# Altium PCB LPS PCB.PcbDoc
Units mm, origin at the board's own origin, x right, y up, seen from the top; angles counter-clockwise.
Board outline 152.4 x 101.6 mm, 2 copper layers (Top Layer, Bottom Layer); 23 components, 10 nets, 49 pads, 0 vias.
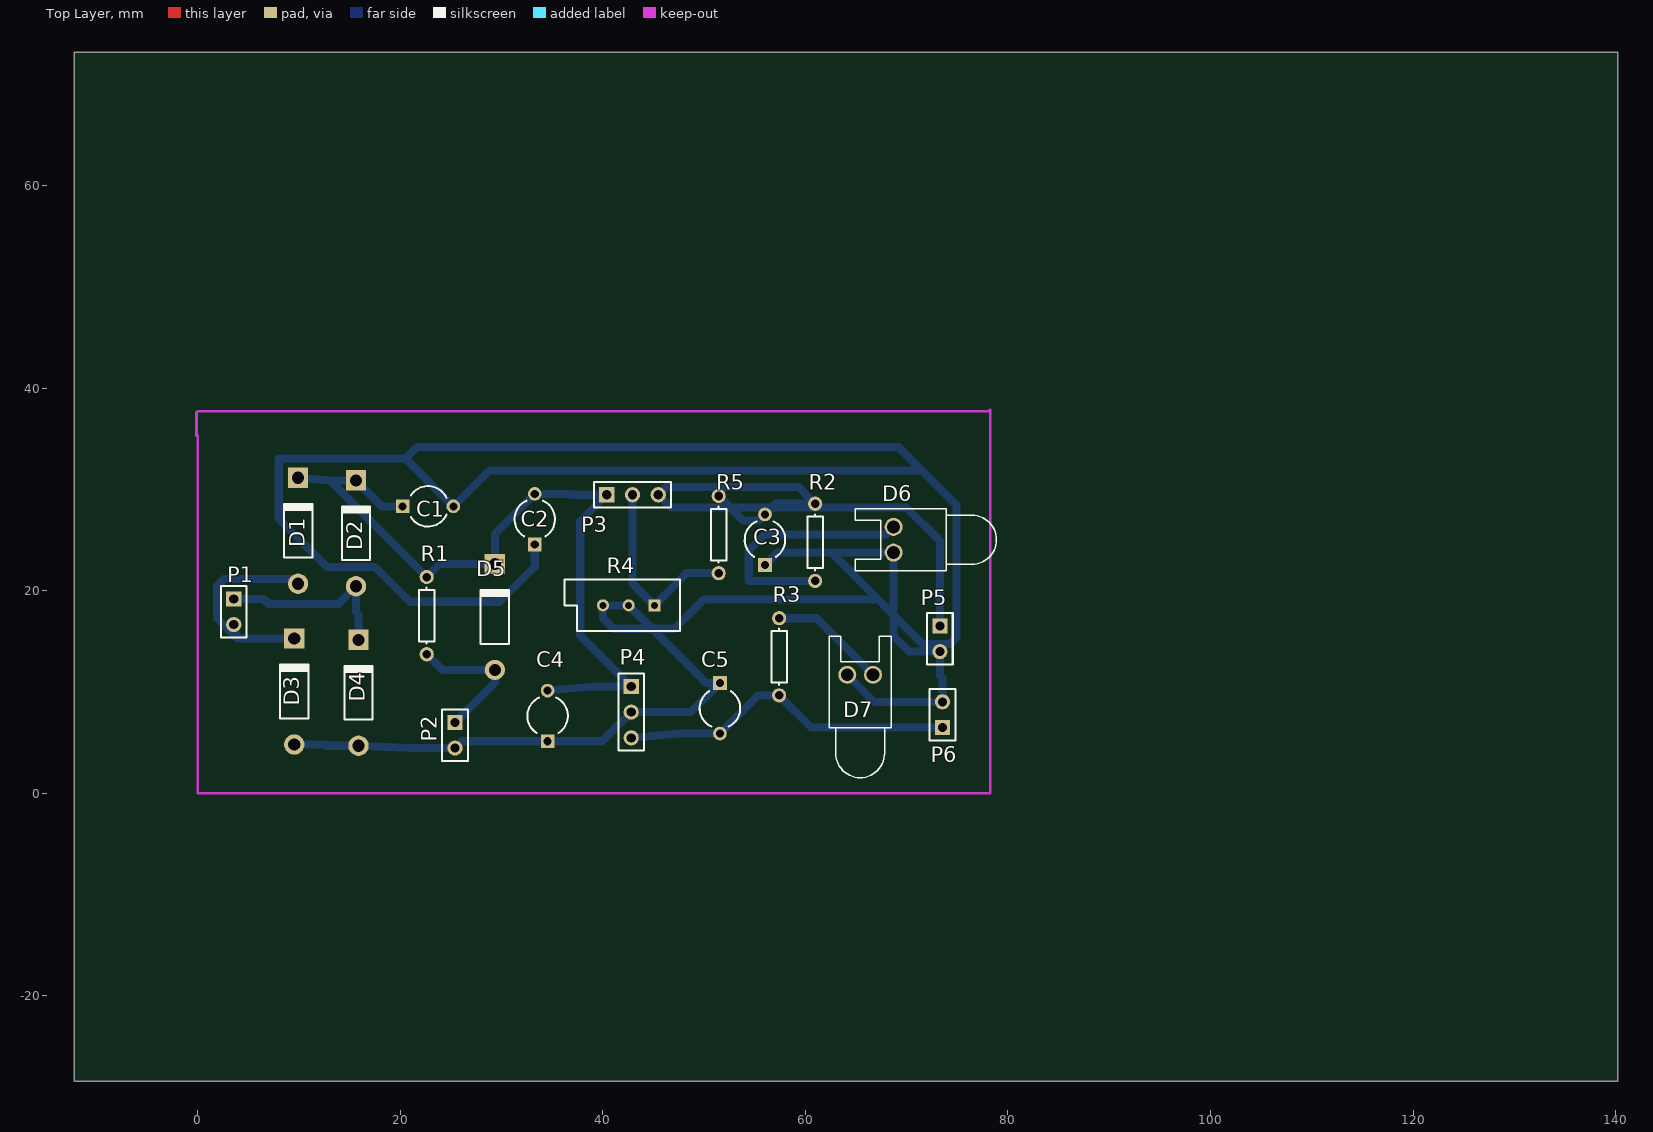
[diagram p0: Top Layer view]
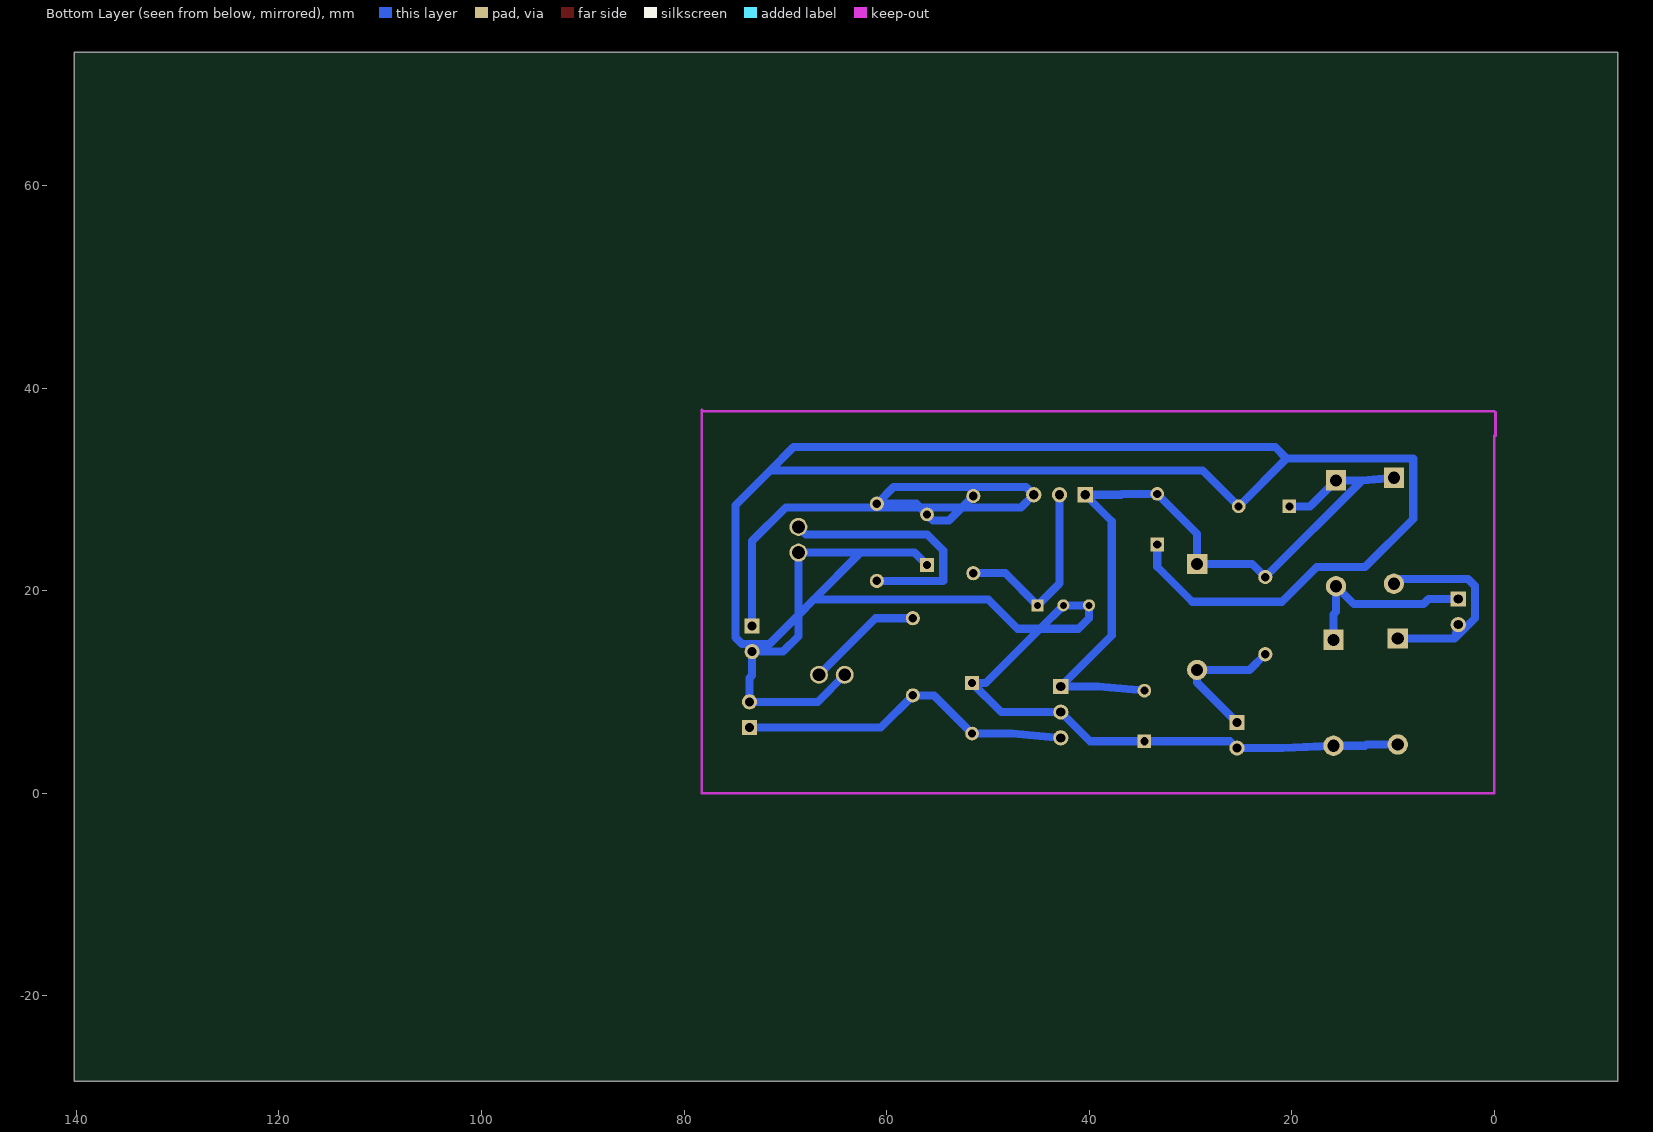
[diagram p1: Bottom Layer view, seen from below]

## Layer stack, top to bottom
Top Layer: signal copper 0.0356
Dielectric: dielectric 0.32, FR-4, Dk 4.8
Bottom Layer: signal copper 0.0356

## Board outline
-12.192,-28.448 140.208,-28.448 140.208,73.152 -12.192,73.152

## Design rules (kind name [scope] priority, off if disabled: settings)
Clearance [All] p1: gap=0.5
PolygonConnect [All] p1: connectstyle=Relief reliefconductorwidth=0.254 reliefentries=4 polygonreliefangle="90 Angle"
RoutingLayers [All] p1: top layer_v5=FALSE bottom layer_v5=TRUE
RoutingTopology [All] p1: topology=Daisy_Simple
RoutingVias [All] p1: holewidth=0.711 width=1.27 viastyle="Through Hole" minholewidth=0.711 minwidth=1.27 maxholewidth=0.711 maxwidth=1.27
SilkscreenOverComponentPads [All] p1: minsilkscreentomaskgap=0.254
SolderMaskExpansion [All] p1: expansion=0.102
Width [All] p1: maxlimit=0.8 minlimit=0.8 preferedwidth=0.8
25 further rules are at their usual default settings.

## Components (designator, comment, footprint, x,y, rotation, side; value= is the part's Value field where it differs from the comment)
C1 "Cap Pol1" CAPR5-4X5 22.733,28.321 r0 top
C2 "Cap" CAPR5-4X5 33.274,27.051 r90 top
C3 "Cap" CAPR5-4X5 56.007,25.019 r90 top
C4 "Cap" CAPR5-4X5 34.544,7.62 r90 top
C5 "Cap" CAPR5-4X5 51.562,8.382 r270 top
D1 "Diode" DO-41 9.906,25.908 r90 top
D2 "Diode" DO-41 15.621,25.654 r90 top
D3 "Diode" DO-41 9.525,10.033 r90 top
D4 "Diode" DO-41 15.875,9.906 r90 top
D5 "D Schottky" DO-41 29.337,17.399 r90 top
D6 "LED2" LED-0 68.707,25.019 r90 top
D7 "LED2" LED-0 65.405,11.684 r0 top
P1 "Header 2H" HDR1X2 3.556,19.177 r270 top
P2 "Header 2H" HDR1X2 25.4,6.985 r270 top
P3 "Header 3" HDR1X3 40.386,29.464 r0 top
P4 "Header 3" HDR1X3 42.799,10.541 r270 top
P5 "Header 2H" HDR1X2 73.279,16.51 r270 top
P6 "Header 2H" HDR1X2 73.533,6.477 r90 top
R1 "Res1" AXIAL-0.3 22.606,17.526 r90 top
R2 "Res1" AXIAL-0.3 60.96,24.765 r90 top
R3 "Res1" AXIAL-0.3 57.404,13.462 r270 top
R4 "RPot" VR5 42.545,18.542 r180 top
R5 "Res1" AXIAL-0.3 51.435,25.527 r90 top

## Footprints (in the part's own frame and the unit in brackets; to place one, negate y for a bottom-side part, rotate by r counter-clockwise, add the part's x,y. Pads: shape width x height; smd on the part's side, far side on the other; paste and mask are expansions set on the pad)
AXIAL-0.3 [mm] "Axial Device, Thru-Hole; 2 Leads; 0.3 in Pin Spacing"
  round 1.4 hole 0.85: 1(-3.81,0) 2(3.81,0)
  silkscreen extent -2.77,-0.76 2.77,0.76
CAPR5-4X5 [mm] "Capacitor; 2 Leads"
  rect 1.35x1.35 hole 0.8: 1(-2.5,0)
  round 1.35 hole 0.8: 2(2.5,0)
  silkscreen extent -1.69,-2 1.82,2
DO-41 [mm] "Diode, Axial; Body 5.2 x 2.7 mm (LxDia. max), Lead Dia. 0.86 mm (max)"
  round 2 hole 1.2: 1(-5.23,0)
  rect 2x2 hole 1.2: 2(5.23,0)
  silkscreen extent -2.65,-1.4 2.75,1.4
HDR1X2 [mm] "Connector; Header; 2 Position"
  rect 1.5x1.5 hole 0.9: 1(0,0)
  round 1.5 hole 0.9: 2(2.54,0)
  silkscreen extent -1.27,-1.27 3.81,1.27
HDR1X3 [mm] "Connector; Header; 3 Position"
  rect 1.5x1.5 hole 0.9: 1(0,0)
  round 1.5 hole 0.9: 2(2.54,0) 3(5.08,0)
  silkscreen extent -1.27,-1.27 6.35,1.27
LED-0 [mil] "LED; 2 Leads"
  round 70 hole 50: 1(50,0) 2(-50,0)
  silkscreen extent -120,-400 120,150
VR5 [mm] "Thru-Hole; 3 Leads"
  rect 1.2x1.2 hole 0.7: 1(-2.54,0)
  round 1.2 hole 0.7: 2(0,0) 3(2.54,0)
  silkscreen extent -5.08,-2.54 6.35,2.54

## Part data
C1: "Polarized Capacitor (Radial)"
C2 C3 C4 C5: "Capacitor"
D1 D2 D3 D4: "Default Diode"
D5: "Schottky Diode"
D6 D7: "Typical RED, GREEN, YELLOW, AMBER GaAs LED"
P1 P2 P5 P6: "Header, 2-Pin, Right Angle"
P3 P4: "Header, 3-Pin"
R1 R2 R3 R5: "Resistor"
R4: "Potentiometer"

## Nets (pads, with @x,y where several pads share a name; then routed paths per layer and width w, separated by ;. In a path a pad name is that pad's centre, name@x,y a point inside that pad or via, vN(x,y) a via of type N, cw(c..) or ccw(c..) an arc to the next point about the centre after c; other vN are vias at no path point)
GND: C1.2 C2.1 C3.1 C4.1 C5.1 D3.1 D4.1 D6.2 D7.2 P2.2 P4.2 P5.2 P6.2 R4.2 R4.3 | length 323.7
  Bottom Layer w0.8: D3.1 12.624,4.803 12.751,4.676 D4.1 20.881,4.445 P2.2 26.075,5.12 C4.1 39.918,5.12 P4.2 48.681,8.001 C5.1 50.205,10.882 44.856,16.231 ; C2.1 33.274,22.352 29.82,18.898 20.952,18.898 17.526,22.324 12.753,22.324 8.001,27.076 8.001,33.045 20.509,33.045 ; C3.1 57.237,23.749 62.56,23.749 ; D7.2 66.802,9.017 P6.2 73.533,11.354 73.279,11.608 P5.2 70.231,13.97 68.707,15.494 68.707,17.602 ; 20.509,33.045 21.626,34.163 69.19,34.163 71.476,31.877 ; 20.509,33.045 C1.2 28.789,31.877 71.476,31.877 ; 44.856,16.231 47.066,16.231 49.936,19.101 67.208,19.101 ; 44.856,16.231 41.046,16.231 40.005,17.272 R4.3 R4.2 44.856,16.231 ; 62.56,23.749 67.208,19.101 ; 62.56,23.749 D6.2 68.707,17.602 ; 67.208,19.101 68.707,17.602 ; 68.707,17.602 71.577,14.732 74.295,14.732 74.93,15.367 74.93,28.423 71.476,31.877
NetC1_1: C1.1 C2.2 C4.2 D1.2 D2.2 D5.2 P3.1 P4.1 R1.2 | length 78.2
  Bottom Layer w0.8: D1.2 13.058,30.884 ; C1.1 18.184,28.321 D2.2 13.058,30.884 ; C4.2 39.105,10.541 P4.1 37.77,15.57 37.77,26.848 P3.1 36.866,29.464 36.779,29.551 C2.2 29.337,25.614 D5.2 23.899,22.629 R1.2 13.058,30.884
NetC3_2: C3.2 P3.3 P5.1 R2.2 R5.2 | length 65.8
  Bottom Layer w0.8: R5.2 52.553,28.219 ; P5.1 73.279,24.892 69.952,28.219 56.707,28.219 ; 52.553,28.219 56.707,28.219 ; 52.553,28.219 53.848,26.924 55.412,26.924 C3.2 56.707,28.219 ; 52.553,28.219 46.711,28.219 P3.3 46.228,30.226 59.309,30.226 R2.2 57.063,28.575 56.707,28.219
NetC5_2: C5.2 P4.3 P6.1 R3.2 | length 33.6
  Bottom Layer w0.8: P4.3 47.589,5.882 C5.2 55.332,9.652 R3.2 60.579,6.477 P6.1
NetD1_1: D1.1 D3.2 P1.2 | length 21.5
  Bottom Layer w0.8: P1.2 3.914,15.263 ; D3.2 3.914,15.263 ; D1.1 9.458,21.126 2.584,21.126 1.905,20.447 1.905,17.272 3.914,15.263
NetD2_1: D2.1 D4.2 P1.1 | length 18.4
  Bottom Layer w0.8: P1.1 6.477,19.177 6.985,18.669 13.866,18.669 D2.1 15.621,17.907 15.875,17.653 D4.2
NetD5_1: D5.1 P2.1 R1.1 | length 14.2
  Bottom Layer w0.8: R1.1 24.153,12.169 D5.1 29.337,10.922 P2.1
NetD6_1: D6.1 R2.1 | length 24.9
  Bottom Layer w0.8: R2.1 60.96,20.93 54.407,20.93 54.407,23.952 55.982,25.527 67.945,25.527 D6.1
NetD7_1: D7.1 R3.1 | length 11.6
  Bottom Layer w0.8: R3.1 61.087,17.272 D7.1
NetP3_2: P3.2 R4.1 R5.1 | length 19.5
  Bottom Layer w0.8: P3.2 42.926,20.701 R4.1 48.26,21.717 R5.1

## Keep-outs
Keep-Out Layer:
  lines w0.254: -0.127,35.306 -0.127,37.592 0,37.719 78.105,37.719 78.232,37.846 78.232,0 0,0 0,35.306 -0.127,35.306